# Altium PCB 3 Phase ESC.PcbDoc (part 1 of 2)
Units mm, origin at the board's own origin, x right, y up, seen from the top; angles counter-clockwise.
Board outline 102.1 x 51.3 mm, 2 copper layers (Top Layer, Bottom Layer); 75 components, 54 nets, 218 pads, 48 vias.
Unrouted connection lines stored in the file: 133.
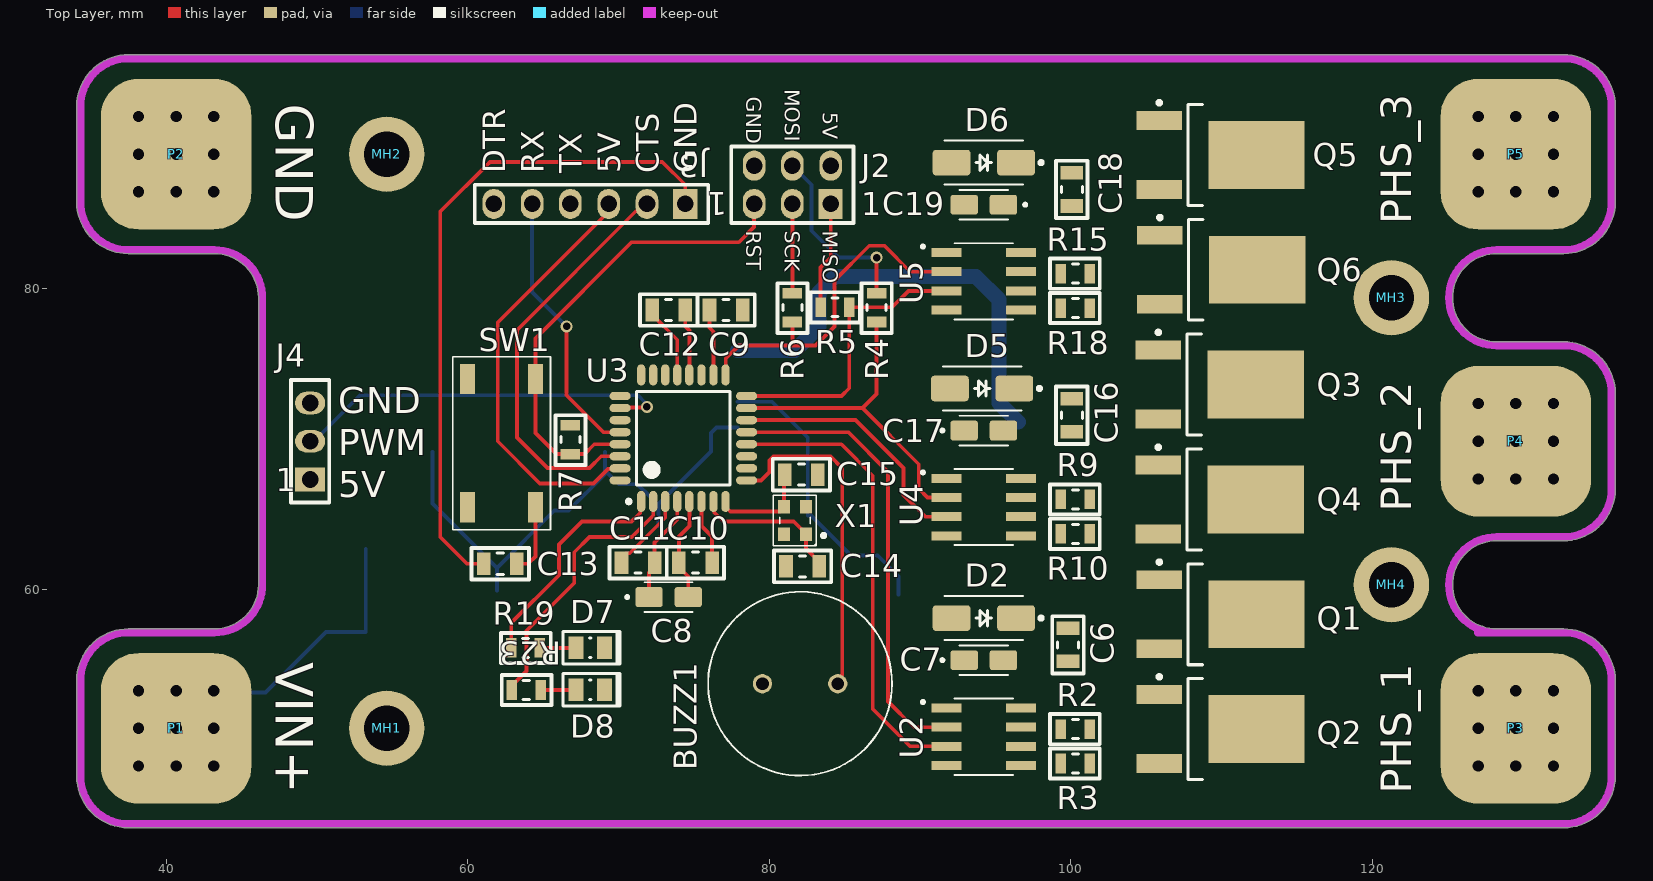
[diagram p0: Top Layer view]
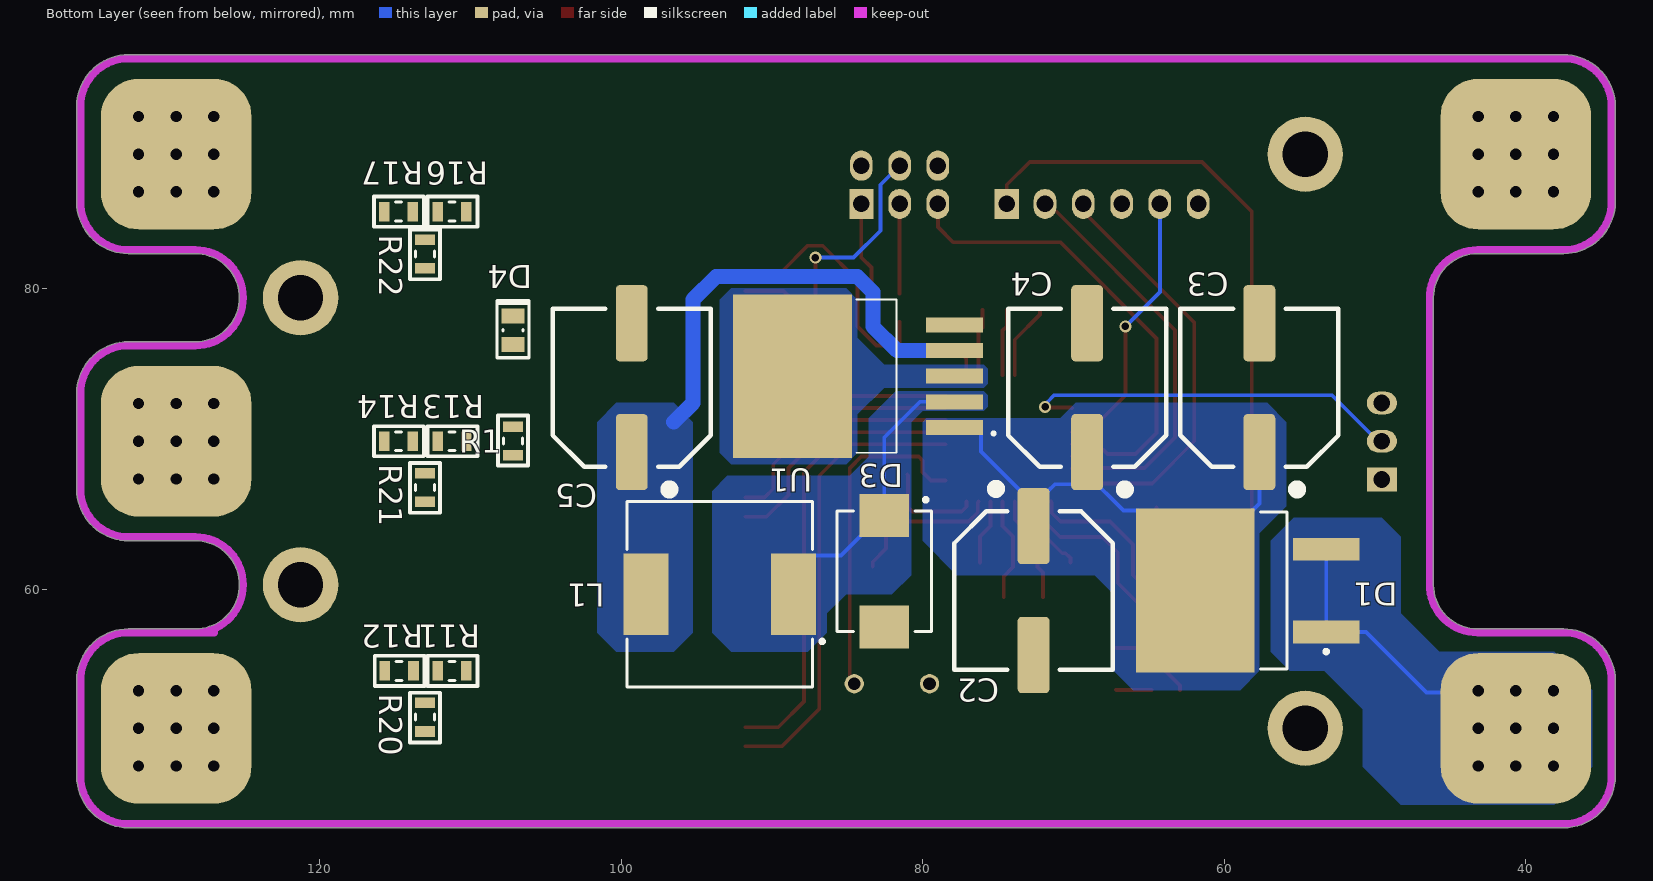
[diagram p1: Bottom Layer view, seen from below]

## Layer stack, top to bottom
Top Solder: solder mask 0.0102, Solder Resist, Dk 3.5
Top Layer: signal copper 0.0356
Dielectric 1: dielectric 0.32, FR-4, Dk 4.8
Bottom Layer: signal copper 0.0356
Bottom Solder: solder mask 0.0102, Solder Resist, Dk 3.5

## Board outline
37.463,44.2 cw(c37.465,47.625) 34.04,47.625 34.04,53.975 cw(c37.465,53.975) 37.465,57.4 43.18,57.4 ccw(c43.18,60.325) 46.105,60.324 46.105,60.325 46.105,79.375 ccw(c43.18,79.375) 43.181,82.3 43.18,82.3 37.465,82.3 cw(c37.465,85.725) 34.04,85.725 34.04,92.075 cw(c37.465,92.075) 37.465,95.5 37.467,95.5 132.715,95.5 cw(c132.715,92.075) 136.14,92.075 136.14,85.725 cw(c132.715,85.725) 132.715,82.3 128.27,82.3 ccw(c128.27,79.375) 125.345,79.375 ccw(c128.27,79.375) 128.27,76.45 132.715,76.45 cw(c132.715,73.025) 136.14,73.025 136.14,66.675 cw(c132.715,66.675) 132.715,63.25 128.27,63.25 ccw(c128.27,60.325) 125.345,60.325 ccw(c128.27,60.325) 128.27,57.4 132.715,57.4 cw(c132.715,53.975) 136.14,53.975 136.14,47.625 cw(c132.715,47.625) 132.715,44.2

## Design rules (kind name [scope] priority, off if disabled: settings)
Clearance [All] p1: gap=0.254 ignorepadtopadclearanceinfootprint=FALSE except(0: Arc-Hole Track-Hole SMDPad-Hole THPad-Hole Via-Hole Fill-Hole Poly-Hole Region-Hole Text-Hole)
PlaneConnect [All] p1: planeconnectstyle=Direct reliefexpansion=0.508 reliefentries=4 reliefconductorwidth=0.254 reliefairgap=0.254
PolygonConnect [All] p1: connectstyle=Direct reliefconductorwidth=0.254 reliefentries=4 polygonreliefangle="90 Angle" airgapwidth=0.254
RoutingVias [All] p1: holewidth=0.711 width=1.27 viastyle="Through Hole" minholewidth=0.711 minwidth=1.27 maxholewidth=0.711 maxwidth=1.27
SolderMaskExpansion [All] p1: expansion=0.102 istentingtop=FALSE
Width [All] p1: maxlimit=0.254 minlimit=0.254 preferedwidth=0.254
29 further rules are at their usual default settings.

## Components (designator, comment, footprint, x,y, rotation, side; value= is the part's Value field where it differs from the comment)
BUZZ1 "BUZZER" BUZZER 82.042,53.761 r180 top
C2 "BXJ63VC100MJ10TP" RADIAL-2_10.00MMX10.00MM 72.644,59.944 r270 bottom
C3 "BXJ63VC100MJ10TP" RADIAL-2_10.00MMX10.00MM 57.658,73.406 r90 bottom
C4 "BXJ63VC100MJ10TP" RADIAL-2_10.00MMX10.00MM 69.088,73.406 r90 bottom
C5 "BDS35VC330MJ10TP" RADIAL-2_10.00MMX10.00MM 99.314,73.406 r90 bottom
C6 "2.2uF" 0805_CAP 99.822,56.336 r270 top
C7 "CAP_10uF_10%_1206_10V_TANT" 1206_TANT_CAP 94.234,55.32 r0 top
C8 "CAP_10uF_10%_1206_10V_TANT" 1206_TANT_CAP 73.322,59.511 r0 top
C9 "1uF" 0805_CAP 77.132,78.561 r180 top
C10 "CAP_0.1uF_%20_50V_0805_X7R_CER" 0805_CAP 75.1,61.797 r0 top
C11 "CAP_0.1uF_%20_50V_0805_X7R_CER" 0805_CAP 71.29,61.797 r0 top
C12 "CAP_0.1uF_%20_50V_0805_X7R_CER" 0805_CAP 73.322,78.561 r0 top
C13 "CAP_0.1uF_%20_50V_0805_X7R_CER" 0805_CAP 62.146,61.722 r180 top
C14 "CAP_10nF_%5_50V_0805_C0G_CER" 0805_CAP 82.21,61.543 r0 top
C15 "CAP_10nF_%5_50V_0805_C0G_CER" 0805_CAP 82.126,67.639 r180 top
C16 "2.2uF" 0805_CAP 100.076,71.576 r270 top
C17 "CAP_10uF_10%_1206_10V_TANT" 1206_TANT_CAP 94.234,70.56 r0 top
C18 "2.2uF" 0805_CAP 100.076,86.562 r270 top
C19 "CAP_10uF_10%_1206_10V_TANT" 1206_TANT_CAP 94.234,85.546 r180 top
D1 "Diode 45V/40A" DPAK275P1410X480-3N 58.674,59.944 r0 bottom
D2 "DIODE_GENERAL_100V_1A_SMA" DIOM5226X220N-SMA 94.234,58.114 r180 top
D3 "DIODE_SCHOTTKY_40V_5A_SMC" DIOM6959X25M_B560C-13-F 82.55,61.214 r270 bottom
D4 "Red" DIOC2114X07N-0805-LED-RED 107.188,77.216 r270 bottom
D5 "DIODE_GENERAL_100V_1A_SMA" DIOM5226X220N-SMA 94.126,73.354 r180 top
D6 "DIODE_GENERAL_100V_1A_SMA" DIOM5226X220N-SMA 94.234,88.34 r180 top
D7 "Green" DIOC2114X07N-0805-LED-GREEN 68.122,56.149 r180 top
D8 "Blue" DIOC2114X07N-0805-LED-BLUE 68.122,53.355 r180 top
J2 "2x3 Male HDR" DIP_2X3_MALE_HEADER_2.54_PITCH 84.074,85.598 r180 top
J3 "1x6 Male HDR" DIP_1X6_MALE_HEADER_2.54_PITCH 74.422,85.598 r180 top
J4 "CONN_1X3_2.54mm_Male Header" DIP_1X3_MALE_HEADER_2.54_PITCH 49.53,67.31 r90 top
L1 "IND_47uH_4.3A_100mOHM_12X12MM_SMD" INDP120120X800N 93.472,59.69 r0 bottom
MH1 "Mounting Hole" MOUNTING_HOLE 54.61,50.8 r0 top
MH2 "Mounting Hole" MOUNTING_HOLE 54.61,88.9 r0 top
MH3 "Mounting Hole" MOUNTING_HOLE 121.285,79.375 r0 top
MH4 "Mounting Hole" MOUNTING_HOLE 121.285,60.325 r0 top
P1 "Power Pad" POWER_SOLDER_PAD 40.64,50.8 r0 top
P2 "Power Pad" POWER_SOLDER_PAD 40.64,88.9 r0 top
P3 "Power Pad" POWER_SOLDER_PAD 129.54,50.8 r0 top
P4 "Power Pad" POWER_SOLDER_PAD 129.54,69.85 r0 top
P5 "Power Pad" POWER_SOLDER_PAD 129.54,88.9 r0 top
Q1 "IRLR7843" DPAK229P991X239-3N 109.982,58.368 r0 top
Q2 "IRLR7843" DPAK229P991X239-3N 109.982,50.748 r0 top
Q3 "IRLR7843" DPAK229P991X239-3N 109.918,73.608 r0 top
Q4 "IRLR7843" DPAK229P991X239-3N 109.918,65.988 r0 top
Q5 "IRLR7843" DPAK229P991X239-3N 109.982,88.848 r0 top
Q6 "IRLR7843" DPAK229P991X239-3N 110.018,81.232 r0 top
R1 "RES_330 OHM_5%_0805_1/8W" 0805_RES 107.188,69.85 r270 bottom
R2 "RES_100 OHM_1%_0805_1/8W" 0805_RES 100.33,50.748 r0 top
R3 "RES_100 OHM_1%_0805_1/8W" 0805_RES 100.33,48.462 r0 top
R4 "RES_22 OHM_1%_1/8W_0805" 0805_RES 87.121,78.74 r90 top
R5 "RES_22 OHM_1%_1/8W_0805" 0805_RES 84.328,78.74 r180 top
R6 "RES_22 OHM_1%_1/8W_0805" 0805_RES 81.534,78.74 r90 top
R7 "10k Ohms" 0805_RES 66.802,69.977 r90 top
R9 "RES_100 OHM_1%_0805_1/8W" 0805_RES 100.33,65.988 r0 top
R10 "RES_100 OHM_1%_0805_1/8W" 0805_RES 100.33,63.702 r0 top
R11 "RES_33K OHM_1%_0805_1/8W" 0805_RES 111.252,54.61 r0 bottom
R12 "RES_33K OHM_1%_0805_1/8W" 0805_RES 114.767,54.61 r0 bottom
R13 "RES_33K OHM_1%_0805_1/8W" 0805_RES 111.252,69.85 r0 bottom
R14 "RES_33K OHM_1%_0805_1/8W" 0805_RES 114.808,69.85 r0 bottom
R15 "RES_100 OHM_1%_0805_1/8W" 0805_RES 100.33,80.974 r0 top
R16 "RES_33K OHM_1%_0805_1/8W" 0805_RES 111.252,85.09 r0 bottom
R17 "RES_33K OHM_1%_0805_1/8W" 0805_RES 114.808,85.09 r0 bottom
R18 "RES_100 OHM_1%_0805_1/8W" 0805_RES 100.33,78.688 r0 top
R19 "RES_330 OHM_5%_0805_1/8W" 0805_RES 63.795,56.134 r180 top
R20 "10k Ohms" 0805_RES 113.03,51.562 r90 bottom
R21 "10k Ohms" 0805_RES 113.03,66.802 r90 bottom
R22 "10k Ohms" 0805_RES 113.03,82.296 r90 bottom
R23 "RES_330 OHM_5%_0805_1/8W" 0805_RES 63.845,53.34 r180 top
SW1 "SWITCH_TACTILE_SPST-NO_0.05A_12V" TACT_SWITCH_6MMX6MM 62.23,69.723 r90 top
U1 "PMIC_LM2596S-5.0/NOPB" TO170P1524X483-6N 84.296,74.168 r0 bottom locked
U2 "DRIVER_IR2101" SOIC127P599X175-8N 94.234,50.24 r0 top
U3 "ATMEGA328P_AU" ATmega8U2_QFP127P600-8N 74.295,70.052 r90 top locked
U4 "DRIVER_IR2101" SOIC127P599X175-8N 94.234,65.48 r0 top
U5 "DRIVER_IR2101" SOIC127P599X175-8N 94.234,80.466 r0 top
X1 "20MHz" 4-SMD_CMOS_OSC_2.50MMX2.00 81.702,64.591 r90 top

## Footprints (in the part's own frame and the unit in brackets; to place one, negate y for a bottom-side part, rotate by r counter-clockwise, add the part's x,y. Pads: shape width x height; smd on the part's side, far side on the other; paste and mask are expansions set on the pad)
4-SMD_CMOS_OSC_2.50MMX2.00 [mm]
  rect 0.9x0.8 smd: 1(-0.925,-0.725) 2(0.925,-0.725) 3(0.925,0.725) 4(-0.925,0.725)
  silkscreen extent -1.68,-2.01 1.68,1.43, body extent -1.25,-1 1.25,1, height 0.91
0805_CAP [mm] "Chip Resistor, 2-Leads, Body 2,00x1,25mm, IPC Medium Density"
  rect 0.9x1.5 smd: 1(-1.1,0) 2(1.1,0)
  silkscreen extent -1.9,-1.05 1.9,1.05, body extent -1,-0.6 1,0.6, height 1.21
0805_RES [mm] "Chip Resistor, 2-Leads, Body 2,00x1,25mm, IPC Medium Density"
  rect 0.7x1.3 smd: 1(-0.975,0) 2(0.925,0)
  silkscreen extent -1.7,-1 1.6,1, body extent -1,-0.6 1,0.6, height 0.61
1206_TANT_CAP [mm]
  rrect25% 1.81x1.32 smd: 1(-1.3,0) 2(1.3,0)
  silkscreen extent -2.85,-0.98 1.6,0.98, body extent -1.6,-0.8 1.6,0.8, height 1.81
ATmega8U2_QFP127P600-8N [mm]
  oval 1.4x0.55 smd: 1(-4.2,2.8) 2(-4.2,2) 3(-4.2,1.2) 4(-4.2,0.4) 5(-4.2,-0.4) 6(-4.2,-1.2) 7(-4.2,-2) 8(-4.2,-2.8) 17(4.2,-2.8) 18(4.2,-2) 19(4.2,-1.2) 20(4.2,-0.4) 21(4.2,0.4) 22(4.2,1.2) 23(4.2,2) 24(4.2,2.8)
  oval 0.55x1.4 smd: 9(-2.8,-4.2) 10(-2,-4.2) 11(-1.2,-4.2) 12(-0.4,-4.2) 13(0.4,-4.2) 14(1.2,-4.2) 15(2,-4.2) 16(2.8,-4.2) 25(2.8,4.2) 26(2,4.2) 27(1.2,4.2) 28(0.4,4.2) 29(-0.4,4.2) 30(-1.2,4.2) 31(-2,4.2) 32(-2.8,4.2)
  silkscreen extent -4.32,-3.1 3.1,3.75, body extent -4.5,-4.5 4.5,4.5, height 1.45
BUZZER [mm]
  round 1.28 hole 0.85: 1(-2.5,0) 2(2.5,0)
  silkscreen extent -6.1,-6.1 6.1,6.1, body extent -6.1,-6.1 6.1,6.1, height 6.51
DIOC2114X07N-0805-LED-BLUE [mm] "Chip Diode, 2-Leads, Body 2,10x1,35mm, IPC Medium Density"
  rect 1x1.5 smd: 1(-0.95,0) 2(0.95,0)
  silkscreen extent -1.97,-1.07 1.83,1.07, body extent -1,-0.63 1,0.63, height 1.12
DIOC2114X07N-0805-LED-GREEN [mm] "Chip Diode, 2-Leads, Body 2,10x1,35mm, IPC Medium Density"
  rect 1x1.5 smd: 1(-0.95,0) 2(0.95,0)
  silkscreen extent -1.97,-1.07 1.83,1.07, body extent -1,-0.63 1,0.63, height 1.12
DIOC2114X07N-0805-LED-RED [mm] "Chip Diode, 2-Leads, Body 2,10x1,35mm, IPC Medium Density"
  rect 1x1.5 smd: 1(-0.95,0) 2(0.95,0)
  silkscreen extent -1.97,-1.07 1.83,1.07, body extent -1,-0.63 1,0.63, height 1.12
DIOM5226X220N-SMA [mm]
  rrect25% 2.5x1.7 smd: 1(-2.14,0) 2(2.14,0)
  silkscreen extent -3.92,-1.46 2.61,1.46, body extent -2.6,-1.36 2.6,1.36, height 2.7
DIOM6959X25M_B560C-13-F [mm] "Molded Diode, 2-Leads, Body 6,86x5,91mm, IPC Low Density"
  rect 2.85x3.3 smd: 1(-3.7,0) 2(3.7,0)
  silkscreen extent -4.87,-3.15 4,3.15, body extent -3.97,-3 3.97,2.91, height 2.25
DIP_1X3_MALE_HEADER_2.54_PITCH [mm]
  rect 1.6x2 hole 1.1: 1(0,0)
  oval 1.5x2 hole 1.1: 2(2.54,0) 3(5.08,0)
  silkscreen extent -1.52,-1.27 6.6,1.27, body extent -1.27,-1.14 6.35,1.4, height 8.96
DIP_1X6_MALE_HEADER_2.54_PITCH [mm]
  rect 1.6x2 hole 1.1: 1(0,0)
  oval 1.5x2 hole 1.1: 2(2.54,0) 3(5.08,0) 4(7.62,0) 5(10.16,0) 6(12.7,0)
  silkscreen extent -1.52,-1.27 13.97,1.27, body extent -1.27,-1.27 13.97,1.27, height 9.2
DIP_2X3_MALE_HEADER_2.54_PITCH [mm]
  rect 1.6x2 hole 1.1: 1(0,0)
  oval 1.5x2 hole 1.1: 2(2.54,0) 3(5.08,0) 4(0,-2.54) 5(2.54,-2.54) 6(5.08,-2.54)
  silkscreen extent -1.52,-3.81 6.6,1.27, body extent -1.27,-3.68 6.35,1.4, height 8.96
DPAK229P991X239-3N [mm] "D-PAK, 3-Pads, Body 6,21x6,73mm (max), IPC Medium Density"
  rect 3x1.25 smd: 1(-4.1,2.29) 3(-4.1,-2.29)
  rect 6.4x4.5 smd: 4(2.35,0)
  silkscreen extent -4.22,-3.35 -1.25,3.59, body extent -4.95,-3.27 4.95,3.27, height 2.51
DPAK275P1410X480-3N [mm] "D2-PAK, 3-Pads, Body 7,65x8,56mm (max), IPC Medium Density"
  rect 4.4x1.5 smd: 1(-5.45,2.75) 3(-5.45,-2.75)
  rect 7.86x10.86 smd: 4(3.25,0)
  silkscreen extent -5.57,-5.2 -1.08,5.2, body extent -5.72,-5.35 6.13,5.35, height 1.77
INDP120120X800N [mm]
  rect 3x5.4 smd: 1(-4.9,0) 2(4.9,0)
  silkscreen extent -6.92,-6.15 6.15,6.15, body extent -6.05,-6.05 6.05,6.05, height 7.29
MOUNTING_HOLE [mm]
  round 5 hole 3: 1(0,0)
POWER_SOLDER_PAD [mm]
  rrect50% 10x10 smd: 1(0,0)
  rrect50% 10x10 smd far side: 1(0,0)
RADIAL-2_10.00MMX10.00MM [mm]
  rrect25% 5.06x2.11 smd: 1(-4.275,0) 2(4.275,0)
  silkscreen extent -6.85,-5.25 5.25,5.25, body extent -5.45,-5.25 5.45,5.25, height 10.56
SOIC127P599X175-8N [mm]
  rect 1.97x0.6 smd: 1(-2.47,1.905) 2(-2.47,0.635) 3(-2.47,-0.635) 4(-2.47,-1.905) 5(2.47,-1.905) 6(2.47,-0.635) 7(2.47,0.635) 8(2.47,1.905)
  silkscreen extent -4.14,-2.52 1.95,2.52, body extent -3,-2.45 3,2.45, height 1.75
TACT_SWITCH_6MMX6MM [mm]
  rect 2x1 smd: 1(-4.25,2.25) 2(4.25,2.25) 3(-4.25,-2.25) 4(4.25,-2.25)
  silkscreen extent -5.75,-3.25 5.75,3.25, body extent -4.5,-3 4.5,3, height 4.31
TO170P1524X483-6N [mm]
  rect 3.79x0.99 smd: 1(-6.4,3.4) 2(-6.4,1.7) 3(-6.4,0) 4(-6.4,-1.7) 5(-6.4,-3.4)
  rect 7.88x10.84 smd paste-6: 6(4.35,0)
  silkscreen extent -9.1,-5.08 0.09,5.08, body extent -7.18,-5.08 7.18,5.08, height 4.65

## Part data
C2 C3 C4: library part CAP_100uF_20%_63V_SMD_ALUM, "CAP.EL.100uF 63V 10x10 105C 5000Hrs SMD", Capacitance=100uF, Manufacturer=SAMYOUNG, Ripple Current=350mA, Tolerance=%20, Voltage Rating=63V, Dimensions=10mmx10mm
C5: library part CAP_330uF_20%_35V_SMD_ALUM, "CAP.EL.330uF 35V 10x10 105C 2000Hrs SMD", Capacitance=330uF, Manufacturer=SAMYOUNG, Ripple Current=450mA, Tolerance=%20, Voltage Rating=35V, Dimensions=10mmx10mm
C6 C16 C18: library part CAP_2.2uF_%10_25V_0805_X5R_CER, "CAP CER 2.2UF 25V X5R 0805", Case Code (Metric)=2012, Case Code (Imperial)=0805, Dielectric=X5R, Manufacturer=Samsung, Manufacturer Part Number=CL21A225KAFNNNE, Max Operating Temperature=85°C, Min Operating Temperature=-55°C, Package Quantity=1, Supplier Part Number 1=1276-1763-1-ND, Tolerance=10%, Voltage Rating=25V, Capacitance=2.2uF, Case/Package=0805, Category="Ceramic Capacitors", ComponentLink1Description=https://datasheet.ciiva.com/25798/cl21a225kafnnne-25798496.pdf?src-supplier=Digi-Key, ComponentLink1URL=https://datasheet.ciiva.com/25798/cl21a225kafnnne-25798496.pdf?src-supplier=Digi-Key, ComponentLink2Description=https://datasheet.ciiva.com/16425/samsung20passive20cl21a225kafnnne-16425804.pdf?src-supplier=Future+Electronics, ComponentLink2URL=https://datasheet.ciiva.com/16425/samsung20passive20cl21a225kafnnne-16425804.pdf?src-supplier=Future+Electronics, ComponentLink3Description=https://datasheet.ciiva.com/26838/getdatasheetpartid-745307-26838602.pdf?src-supplier=Verical, ComponentLink3URL=https://datasheet.ciiva.com/26838/getdatasheetpartid-745307-26838602.pdf?src-supplier=Verical, Construction=Flat, Depth=1.25mm, Height=1.25mm, Length=2mm, Mount="Surface Mount", Packaging="Tape and Reel", Pricing 1="1=0,13000, 10=0,09300, 50=0,05280, 100=0,04380, 500=0,03070, 1000=0,02541 (USD)", Radiation Hardening=No, RoHS=Yes, RoHS Compliant=Yes, Series=CL, Stock 1=282255, Supplier 1=Digi-Key, Thickness=0.053inch, Width=0.049inch
C7 C8 C17 C19: "Cap Tant Solid 10uF 10V A CASE 10% (3.2 X 1.6 X 1.6mm) Inward L SMD 3216-18 3 Ohm 125C T/R", Capacitance=10uF, Case Code (Metric)=3216, Case Code (Imperial)=1206, Case/Package=Molded, ESR (Equivalent Series Resistance)=3R, Leakage Current=1uA, Manufacturer="Kyocera AVX", Manufacturer Part Number=TAJA106K010SNJ, Max Operating Temperature=125°C, Min Operating Temperature=-55°C, Package Quantity=8000, Supplier Part Number 1=478-13122-1-ND, Tolerance=10%, Voltage Rating=10V, Category="Tantalum Capacitors", ComponentLink1Description=https://datasheet.ciiva.com/12909/taj-27497-12909898.pdf?src-supplier=Mouser, ComponentLink1URL=https://datasheet.ciiva.com/12909/taj-27497-12909898.pdf?src-supplier=Mouser, Construction=Flat, Depth=1.6mm, Dissipation Factor=6%, Height=1.8mm, Lead Free="Lead Free", Length=3.2mm, Number of Pins=2, Packaging="Tape and Reel", Polarity=Polar, Pricing 1="1=0,31000, 10=0,21300, 50=0,14920, 100=0,12780, 500=0,09584, 1000=0,08094, 2500=0,07668 (USD)", Radiation Hardening=No, RoHS=Yes, RoHS Compliant=Yes, Series=TAJ, Stock 1=14579, Supplier 1=Digi-Key, Termination=SMD/SMT, Voltage Rating (DC)=10V, Width=1.6mm
C9: library part CAP_1uF_%10_25V_0805_X7R_CER, "陶瓷电容 1uF(105) 1uF ±10% 25V 0805", Case Code (Metric)=2012, Case Code (Imperial)=0805, Dielectric=X7R, Manufacturer=Samsung, Manufacturer Part Number=CL21B105KAFNNNG, Max Operating Temperature=125°C, Min Operating Temperature=-55°C, Package Quantity=3000, Supplier Part Number 1=1276-6469-1-ND, Tolerance=10%, Voltage=25V, Capacitance=1uF, Case/Package=0805, Category="Ceramic Capacitors", ComponentLink1Description=https://datasheet.ciiva.com/26920/getdatasheetpartid-698495-26920200.pdf?src-supplier=Verical, ComponentLink1URL=https://datasheet.ciiva.com/26920/getdatasheetpartid-698495-26920200.pdf?src-supplier=Verical, ComponentLink2Description=https://datasheet.ciiva.com/29199/455911-da-01-en-vs-kondensator-0805-29199043.pdf?src-supplier=Conrad, ComponentLink2URL=https://datasheet.ciiva.com/29199/455911-da-01-en-vs-kondensator-0805-29199043.pdf?src-supplier=Conrad, ComponentLink3Description=https://datasheet.ciiva.com/16428/cl05b104kq5nnnc-16428871.pdf?src-supplier=Future+Electronics, ComponentLink3URL=https://datasheet.ciiva.com/16428/cl05b104kq5nnnc-16428871.pdf?src-supplier=Future+Electronics, Depth=1.25mm, Height=1.25mm, Length=2mm, Material=Ceramic, Mount="Surface Mount", Packaging="Tape and Reel", Pricing 1="1=0,10000, 10=0,07100, 50=0,03880, 100=0,03170, 500=0,02264, 1000=0,01779 (USD)", Radiation Hardening=No, RoHS=Yes, RoHS Compliant=Yes, Series=CL, Stock 1=509034, Supplier 1=Digi-Key, Thickness=0.053inch, Voltage Rating=25V, Width=0.049inch
C10 C11 C12 C13: "Cap Ceramic 0.1uF 50V X7R 20% SMD 0805 125C Paper T/R", Capacitance=100nF, Case/Package=0805, Dielectric=X7R, Dielectric Material=Ceramic, Manufacturer=KEMET, Manufacturer Part Number=C0805C104M5RACTU, Max Operating Temperature=125°C, Min Operating Temperature=-55°C, Supplier Part Number 1=399-C0805C104M5RAC7800CT-ND, Tolerance=20%, Voltage Rating (DC)=50V, Category="Ceramic Capacitors", ComponentLink1Description=http://uk.rs-online.com/webdocs/13da/0900766b813daa06.pdf?src-supplier=RSComponents, ComponentLink1URL=http://uk.rs-online.com/webdocs/13da/0900766b813daa06.pdf?src-supplier=RSComponents, ComponentLink2Description=https://www.verical.com/server-webapp/html/getDatasheet?partID=774625&src-supplier=Verical, ComponentLink2URL=https://www.verical.com/server-webapp/html/getDatasheet?partID=774625&src-supplier=Verical, ComponentLink3Description=http://www.farnell.com/datasheets/2739857.pdf?src-supplier=Farnell, ComponentLink3URL=http://www.farnell.com/datasheets/2739857.pdf?src-supplier=Farnell, ComponentLink4Description=http://uk.rs-online.com/webdocs/1515/0900766b81515223.pdf?src-supplier=RSComponents, ComponentLink4URL=http://uk.rs-online.com/webdocs/1515/0900766b81515223.pdf?src-supplier=RSComponents, ComponentLink5Description=http://components.arrow.com/part/dataview/0323_00324812?src-supplier=Arrow+Europe, ComponentLink5URL=http://components.arrow.com/part/dataview/0323_00324812?src-supplier=Arrow+Europe, ComponentLink6Description=http://uk.rs-online.com/webdocs/1528/0900766b81528e2f.pdf?src-supplier=RSComponents, ComponentLink6URL=http://uk.rs-online.com/webdocs/1528/0900766b81528e2f.pdf?src-supplier=RSComponents, ComponentLink7Description=http://www.farnell.com/datasheets/2739857.pdf?src-supplier=Newark, ComponentLink7URL=http://www.farnell.com/datasheets/2739857.pdf?src-supplier=Newark, ComponentLink8Description=http://www.alliedelec.com/m/d/9bfe7773041ffe9d406e68bc7b377fdd.pdf?src-supplier=Allied+Electronics, ComponentLink8URL=http://www.alliedelec.com/m/d/9bfe7773041ffe9d406e68bc7b377fdd.pdf?src-supplier=Allied+Electronics, ComponentLink9Description=https://api.kemet.com/component-edge/download/datasheet/C0805C104M5RACTU.pdf?src-supplier=Digi-Key, ComponentLink9URL=https://api.kemet.com/component-edge/download/datasheet/C0805C104M5RACTU.pdf?src-supplier=Digi-Key, ComponentLink10Description=http://capacitoredge.kemet.com/capedge2/DataSheet?pn=C0805C104M5RACTU&src-supplier=Avnet+Europe, ComponentLink10URL=http://capacitoredge.kemet.com/capedge2/DataSheet?pn=C0805C104M5RACTU&src-supplier=Avnet+Europe, ComponentLink11Description=http://www.farnell.com/datasheets/2739857.pdf?src-supplier=Element14, ComponentLink11URL=http://www.farnell.com/datasheets/2739857.pdf?src-supplier=Element14, ComponentLink12Description=http://www.mouser.com/ds/2/212/KEM_C1002_X7R_SMD-1102033.pdf?src-supplier=Mouser, ComponentLink12URL=http://www.mouser.com/ds/2/212/KEM_C1002_X7R_SMD-1102033.pdf?src-supplier=Mouser, ComponentLink13Description=https://www.verical.com/server-webapp/html/getDatasheet?partID=91523&src-supplier=Verical, ComponentLink13URL=https://www.verical.com/server-webapp/html/getDatasheet?partID=91523&src-supplier=Verical, ComponentLink14Description=http://components.arrow.com/part/dataview/2091108S8109171N7429?src-supplier=Arrow+Electronics, ComponentLink14URL=http://components.arrow.com/part/dataview/2091108S8109171N7429?src-supplier=Arrow+Electronics, Depth=1.25mm, Height=0.9mm, Length=2mm, Mount="Surface Mount", Packaging="Tape and Reel", Pricing 1="1=0,10000, 10=0,06400, 50=0,03500, 100=0,02860, 500=0,02040, 1000=0,01603 (USD)", Radiation Hardening=No, RoHS=Yes, Stock 1=4863, Supplier 1=Digi-Key
C14 C15: "CGA Series 0805 10 nF 50 V ±5 % Tolerance C0G SMT Multilayer Ceramic Capacitor", Capacitance=10nF, Case Code (Metric)=2012, Case Code (Imperial)=0805, Dielectric=C0G, Manufacturer=TDK, Manufacturer Part Number=CGA4C2C0G1H103J060AA, Max Operating Temperature=125°C, Min Operating Temperature=-55°C, Package Quantity=1, Ratings=AEC-Q200, Resistor Type=Ceramic, Supplier Part Number 1=445-6947-1-ND, Tolerance=5%, Voltage Rating=50V, Case/Package=0805, Category="Ceramic Capacitors", ComponentLink1Description=https://datasheet.ciiva.com/15215/getdatasheetpartid-712412-15215921.pdf?src-supplier=Verical, ComponentLink1URL=https://datasheet.ciiva.com/15215/getdatasheetpartid-712412-15215921.pdf?src-supplier=Verical, ComponentLink2Description=https://datasheet.ciiva.com/24219/cga4c2c0g1h103j060aa-265903-24219348.pdf?src-supplier=Mouser, ComponentLink2URL=https://datasheet.ciiva.com/24219/cga4c2c0g1h103j060aa-265903-24219348.pdf?src-supplier=Mouser, Depth=1.25mm, Height=0.6mm, Lead Free="Lead Free", Length=2mm, Mount="Surface Mount", Packaging="Tape and Reel", Pricing 1="1=0,32000, 10=0,21800, 50=0,14520, 100=0,12340, 500=0,08712, 1000=0,07623 (USD)", Radiation Hardening=No, REACH SVHC="No SVHC", RoHS=Yes, RoHS Compliant=Yes, Series=CGA, Stock 1=35061, Supplier 1=Digi-Key, Termination=SMD/SMT, Thickness=0.028inch, Voltage Rating (DC)=50V, Weight=0.000194oz, Width=0.049inch
D1: library part DIODE_SCHOTTKY_45V_40A_TO263, "Diode Schottky 45V 40A 3-Pin TO-263 T/R", Manufacturer=Panjit, Manufacturer Part Number=SBM4045LDC_R2_00001, Supplier Part Number 1=241-SBM4045LDCR20000, Pricing 1="1=1,48000, 10=1,34000, 50=1,34000, 100=1,04000, 1000=0,67700, 10000=0,63100 (USD)", Supplier 1=Mouser
D2 D5 D6: "Si-diode 1A 100V Sma", Case/Package=SMA, Forward Current=1A, Manufacturer="Pan Jit", Manufacturer Part Number=US1B_R1_00001, Max Operating Temperature=150°C, Max Repetitive Reverse Voltage (Vrrm)=100V, Max Reverse Current=1uA, Min Operating Temperature=-55°C, Peak Non-Repetitive Surge Current=30A, Supplier Part Number 1=3757-US1B_R1_00001CT-ND, Category="Rectifier Diodes", Element Configuration=Single, Mount="Surface Mount", Pricing 1="1=0,42000, 10=0,34100, 100=0,18060, 500=0,11880 (USD)", Reverse Recovery Time=50ns, RoHS=Yes, RoHS Compliant=Yes, Stock 1=5400, Supplier 1=Digi-Key
D3: "VR=40V IF=5A 300pF", Average Rectified Current=5A, Capacitance=300pF, Case/Package=SMC, Forward Voltage=550mV, Manufacturer=Diodes, Manufacturer Part Number=B540C-13-F, Max Forward Surge Current (Ifsm)=100A, Max Operating Temperature=125°C, Max Repetitive Reverse Voltage (Vrrm)=40V, Max Reverse Current=500uA, Min Operating Temperature=-55°C, Package Quantity=3000, Supplier Part Number 1=B540C-FDICT-ND, Category="Rectifier Diodes", Contact Plating=Tin,Matte, Current=5A, Current Rating=5A, Element Configuration=Single, Forward Current=5A, Height=2.5mm, Lead Free="Lead Free", Length=7.11mm, Max Reverse Voltage (DC)=40V, Mount="Surface Mount", Number of Pins=2, Output Current=5A, Packaging="Cut Tape", Peak Non-Repetitive Surge Current=100A, Polarity=Standard, Radiation Hardening=No, REACH SVHC="No SVHC", RoHS=Yes, RoHS Compliant=Yes, Series="B520C/CQ - B560C/CQ", Supplier 1=Digi-Key, Termination=SMD/SMT, Voltage=40V, Voltage Rating (DC)=40V, Weight=0.007408oz, Width=6.22mm
D4: library part "LED_RED CLEAR_2SMD/0805", "Led Red Clear 2SMD", Case/Package=0805, Forward Voltage=2V, Lens Color=Colorless, Manufacturer=Everlight, Manufacturer Part Number=EAST2012RA1, Supplier Part Number 1=1080-EAST2012RA1CT-ND, Test Current=20mA, Category=LEDs, Color=Red, ComponentLink1Description=http://www.mouser.com/ds/2/143/EAST2012RA1-707412.pdf?src-supplier=Mouser, ComponentLink1URL=http://www.mouser.com/ds/2/143/EAST2012RA1-707412.pdf?src-supplier=Mouser, ComponentLink2Description=https://everlightamericas.com/index.php?controller=attachment&id_attachment=1047&src-supplier=Digi-Key, ComponentLink2URL=https://everlightamericas.com/index.php?controller=attachment&id_attachment=1047&src-supplier=Digi-Key, Dominant Wavelength=626nm, Height=1mm, Length=2mm, Lens Transparency=Clear, Luminous Intensity=79mcd, Mount="Surface Mount", Packaging="Tape and Reel", Pricing 1="1=0,23000, 10=0,12300, 100=0,05840, 500=0,04996, 1000=0,03842 (USD)", RoHS Compliant=Yes, Stock 1=154, Supplier 1=Digi-Key, Viewing Angle=120°, Width=1.25mm
D7: library part "LED_GREEN CLEAR_2SMD/0805", "Led Green Clear 2SMD", Case/Package=0805, Forward Voltage=3.4V, Lens Color=Colorless, Manufacturer=Everlight, Manufacturer Part Number=EAST2012GA5, Supplier Part Number 1=1080-EAST2012GA5CT-ND, Test Current=20mA, Category=LEDs, Color=Green, ComponentLink1Description=http://www.mouser.com/ds/2/143/EAST2012GA5-707028.pdf?src-supplier=Mouser, ComponentLink1URL=http://www.mouser.com/ds/2/143/EAST2012GA5-707028.pdf?src-supplier=Mouser, ComponentLink2Description=https://everlightamericas.com/index.php?controller=attachment&id_attachment=1042&src-supplier=Digi-Key, ComponentLink2URL=https://everlightamericas.com/index.php?controller=attachment&id_attachment=1042&src-supplier=Digi-Key, Dominant Wavelength=523nm, Height=1mm, Length=2mm, Lens Transparency=Clear, Luminous Intensity=315mcd, Mount="Surface Mount", Packaging="Tape and Reel", Pricing 1="1=0,44000, 10=0,29000, 100=0,19380, 500=0,13406, 1000=0,11172 (USD)", RoHS Compliant=Yes, Stock 1=15531, Supplier 1=Digi-Key, Viewing Angle=140°, Width=1.25mm
D8: library part "LED_BLUE CLEAR_2SMD/0805", "Blue 0805 140° 112 mcd Clear 3.3 V Surface Mount LED", Case/Package=0805, Forward Voltage=3.3V, Lens Color=Colorless, Manufacturer=Everlight, Manufacturer Part Number=EAST2012BA2, Supplier Part Number 1=EAST2012BA2-ND, Test Current=20mA, Category=LEDs, Color=Blue, ComponentLink1Description=http://www.mouser.com/ds/2/143/EAST2012BA2-707392.pdf?src-supplier=Mouser, ComponentLink1URL=http://www.mouser.com/ds/2/143/EAST2012BA2-707392.pdf?src-supplier=Mouser, ComponentLink2Description=https://everlightamericas.com/index.php?controller=attachment&id_attachment=1036&src-supplier=Digi-Key, ComponentLink2URL=https://everlightamericas.com/index.php?controller=attachment&id_attachment=1036&src-supplier=Digi-Key, Dominant Wavelength=471nm, Height=1.1mm, Lead Free="Lead Free", Length=2mm, Lens Transparency=Clear, Luminous Intensity=79mcd, Mount="Surface Mount", Packaging="Tape and Reel", Pricing 1="9000=0,05724 (USD)", RoHS=Yes, RoHS Compliant=Yes, Supplier 1=Digi-Key, Viewing Angle=140°, Width=1.25mm
J2: library part "CONN_2X3_2.54mm_Male Header", "Conn Unshrouded Header HDR 6 POS 2.54mm Solder ST Thru-Hole Poly Bag", Manufacturer="Amphenol ICC / FCI", Manufacturer Part Number=67998-206, Category="Headers and Wire Housings", ComponentLink1Description=http://portal.fciconnect.com/Comergent//fci/drawing/67996.pdf?src-supplier=Digi-Key, ComponentLink1URL=http://portal.fciconnect.com/Comergent//fci/drawing/67996.pdf?src-supplier=Digi-Key, ComponentLink2Description=http://portal.fciconnect.com/Comergent/fci/drawing/67996.pdf?src-supplier=Avnet, ComponentLink2URL=http://portal.fciconnect.com/Comergent/fci/drawing/67996.pdf?src-supplier=Avnet, Pricing 1="4800=0,21933, 5600=0,21344, 10400=0,20314, 24000=0,19578, 48000=0,18989, 240000=0,18400, 480000=0,17958 (USD)", Supplier 1=Avnet, Supplier Part Number 1=67998-206
J3: library part "CONN_1X6_2.54m_Male Header", "PH Series 6 Position Through Hole Single Row Straight .100 Header", Manufacturer="Adam Equipment", Manufacturer Part Number=PH1-06-UA, Supplier Part Number 1=2057-PH1-06-UA-ND, Category=Connectors, ComponentLink1Description=http://www.adam-tech.com/catalog/2012/page_312-315.pdf?src-supplier=Future+Electronics, ComponentLink1URL=http://www.adam-tech.com/catalog/2012/page_312-315.pdf?src-supplier=Future+Electronics, Contact Plating=Gold, Lead Free="Lead Free", Mount="Through Hole", Number of Contacts=6, Number of Positions=6, Number of Rows=1, Packaging=Bag, Pitch=2.54mm, Pricing 1="1=0,13000, 10=0,10000, 100=0,07370, 500=0,06098, 1000=0,05336, 5000=0,04574, 10000=0,04447 (USD)", RoHS=Yes, Stock 1=1029, Supplier 1=Digi-Key
J4: "Conn Header Vert 3POS 2.54MM", Color=Black, Manufacturer=Sullins, Manufacturer Part Number=PREC003SAAN-RC, Package Quantity=1, Supplier Part Number 1=S1012EC-03-ND, Category=Connectors, ComponentLink1Description=https://datasheet.ciiva.com/740/zrzczzzszzn-rc-st-11635-b-740842.pdf?src-supplier=Digi-Key, ComponentLink1URL=https://datasheet.ciiva.com/740/zrzczzzszzn-rc-st-11635-b-740842.pdf?src-supplier=Digi-Key, Connector Type="Male Pin", Contact Mating Length=0.23inch, Contact Plating=Tin, Contact Type="Male Pin", Mount="Through Hole", Number of Positions=3, Number of Rows=1, Packaging=Bulk, Pitch=0.1inch, Pricing 1="1=0,09000, 10=0,08400, 25=0,06240, 50=0,05340, 100=0,05170, 250=0,04456, 500=0,04276 (USD)", RoHS=Yes, RoHS Compliant=Yes, Series=-, Stock 1=15048, Supplier 1=Digi-Key, Termination=Solder
L1: "INDUCTOR POWER 47UH 12X12MM SMD", Current Rating=4.3A, DC Resistance (DCR)=100mR, Manufacturer="CORE MASTER", Manufacturer Part Number=SRI1207-470M, Tolerance=20%, Inductance=47uH
MH1 MH2 MH3 MH4: library part MOUNTING_HOLE
P1 P2 P3 P4 P5: library part POWER_PAD
Q1 Q2 Q3 Q4 Q5 Q6: library part MOSFET_IRLR7843TRPBF, "MOSFET N-CH 30V 161A DPAK", Case/Package=TO-252-3, Continuous Drain Current (ID)=161A, Drain to Source Breakdown Voltage=30V, Drain to Source Resistance=3.3mR, Gate to Source Voltage (Vgs)=20V, Manufacturer=Infineon, Manufacturer Part Number=IRLR7843TRPBF, Max Operating Temperature=175°C, Max Power Dissipation=140W, Min Operating Temperature=-55°C, Supplier Part Number 1=IRLR7843PBFCT-ND, Threshold Voltage=2.3V, Input Capacitance=4.38nF, Category=MOSFETs, ComponentLink1Description=http://www.farnell.com/datasheets/107858.pdf?src-supplier=Farnell, ComponentLink1URL=http://www.farnell.com/datasheets/107858.pdf?src-supplier=Farnell, ComponentLink2Description=https://www.alliedelec.com/m/d/e4530362cf37d0e7350522b44819c1b2.pdf?src-supplier=Allied+Electronics, ComponentLink2URL=https://www.alliedelec.com/m/d/e4530362cf37d0e7350522b44819c1b2.pdf?src-supplier=Allied+Electronics, ComponentLink3Description=http://www.farnell.com/datasheets/107858.pdf?src-supplier=Element14, ComponentLink3URL=http://www.farnell.com/datasheets/107858.pdf?src-supplier=Element14, ComponentLink4Description=https://www.infineon.com/dgdl/irlr7843pbf.pdf?fileId=5546d462533600a40153566de53526d8&src-supplier=Digi-Key, ComponentLink4URL=https://www.infineon.com/dgdl/irlr7843pbf.pdf?fileId=5546d462533600a40153566de53526d8&src-supplier=Digi-Key, ComponentLink5Description=http://www.infineon.com/dgdl/irlr7843pbf.pdf?fileId=5546d462533600a40153566de53526d8&src-supplier=Digi-Key, ComponentLink5URL=http://www.infineon.com/dgdl/irlr7843pbf.pdf?fileId=5546d462533600a40153566de53526d8&src-supplier=Digi-Key, Contact Plating=Tin,Matte, Drain to Source Voltage (Vdss)=30V, Halogen Free="Halogen Free", Height=0.094inch, Lead Free="Contains Lead", Length=0.264inch, Max Dual Supply Voltage=30V, Mount="Surface Mount", Number of Pins=3, Packaging="Cut Tape", Power Dissipation=140W, Pricing 1="1=1,73000, 10=1,54800, 100=1,20670, 500=0,99682, 1000=0,87440 (USD)", Rds On Max=3.3mR, REACH SVHC="No SVHC", Rise Time=42ns, RoHS=Yes, RoHS Compliant=Yes, Stock 1=5978, Supplier 1=Digi-Key, Turn-Off Delay Time=34ns, Turn-On Delay Time=25ns, Width=0.245inch
R1 R19 R23: "Res Thick Film 0805 330 Ohm 5% 0.125W(1/8W) ±100ppm/C Pad SMD Automotive T/R", Manufacturer="TE Connectivity", Manufacturer Part Number=CRGCQ0805J330R, Resistance=330R, Supplier Part Number 1=A130131CT-ND, Category="Chip SMD Resistors", ComponentLink1Description=https://www.te.com/commerce/DocumentDelivery/DDEController?Action=srchrtrv&amp;DocNm=1773204-3&amp;DocType=DS&amp;DocLang=English&src-supplier=Digi-Key, ComponentLink1URL=https://www.te.com/commerce/DocumentDelivery/DDEController?Action=srchrtrv&amp;DocNm=1773204-3&amp;DocType=DS&amp;DocLang=English&src-supplier=Digi-Key, Pricing 1="1=0,10000, 10=0,04400, 100=0,01780, 1000=0,00798, 2500=0,00693 (USD)", RoHS=Yes, Stock 1=75221, Supplier 1=Digi-Key
R2 R3 R9 R10 R15 R18: "贴片电阻 100Ω ± 1.00% 0.125W ± 100ppm/℃ 0805", Case Code (Metric)=2012, Case Code (Imperial)=0805, Manufacturer=Yageo, Manufacturer Part Number=RC0805FR-07100RL, Max Operating Temperature=155°C, Max Power Dissipation=125mW, Min Operating Temperature=-55°C, Package Quantity=5000, Resistance=100R, Resistor Type="Thick Film", Supplier Part Number 1=311-100CRCT-ND, Temperature Coefficient=100ppm/°C, Tolerance=1%, Voltage Rating=150V, Application(s)="HIGH RELIABILITY", Case/Package=0805, Category="Chip SMD Resistors", ComponentLink1Description=https://datasheet.ciiva.com/11808/0900766b8106beab-11808877.pdf?src-supplier=RSComponents, ComponentLink1URL=https://datasheet.ciiva.com/11808/0900766b8106beab-11808877.pdf?src-supplier=RSComponents, ComponentLink2Description=https://datasheet.ciiva.com/7941/1697719-7941680.pdf?src-supplier=Element14, ComponentLink2URL=https://datasheet.ciiva.com/7941/1697719-7941680.pdf?src-supplier=Element14, ComponentLink3Description=https://datasheet.ciiva.com/7660/38627-7660797.pdf?src-supplier=Element14, ComponentLink3URL=https://datasheet.ciiva.com/7660/38627-7660797.pdf?src-supplier=Element14, ComponentLink4Description=https://datasheet.ciiva.com/2456/pyu-r-int-thick-7-2456987.pdf?src-supplier=Digi-Key, ComponentLink4URL=https://datasheet.ciiva.com/2456/pyu-r-int-thick-7-2456987.pdf?src-supplier=Digi-Key, Depth=1.25mm, Features="Moisture Resistant", Height=0.5mm, Lead Free="Lead Free", Lead Pitch=0.4mm, Length=2mm, Military Standard=Not, Number of Pins=2, Number of Terminations=2, Packaging="Cut Tape", Power Rating=125mW, Pricing 1="1=0,10000, 10=0,04200, 100=0,01690, 1000=0,00759, 2500=0,00659 (USD)", REACH SVHC=Unknown, RoHS=Yes, RoHS Compliant=Yes, Series=RC, Stock 1=3418646, Supplier 1=Digi-Key, Technology="THICK FILM", Termination=SMD/SMT, Type="General Purpose", Voltage Rating (DC)=150V, Weight=0.000917oz, Width=1.25mm
R4 R5 R6: "Res Thick Film 0805 22 Ohm 1% 0.125W(1/8W) ±100ppm/C Pad SMD T/R", Case Code (Metric)=2012, Case Code (Imperial)=0805, Manufacturer="Vishay Dale", Manufacturer Part Number=CRCW080522R0FKEAC, Max Operating Temperature=155°C, Max Power Dissipation=125mW, Min Operating Temperature=-55°C, Resistance=22R, Resistor Type="Thick Film", Supplier Part Number 1=541-4151-1-ND, Temperature Coefficient=100ppm/°C, Tolerance=1%, Case/Package=0805, ComponentLink1Description=http://www.vishay.com/docs/28773/crcwce3.pdf?src-supplier=Digi-Key, ComponentLink1URL=http://www.vishay.com/docs/28773/crcwce3.pdf?src-supplier=Digi-Key, Number of Terminations=2, Packaging="Tape and Reel", Pricing 1="1=0,10000, 10=0,06300, 100=0,02540, 1000=0,01143, 2500=0,00992 (USD)", RoHS=Yes, RoHS Compliant=Yes, Stock 1=199510, Supplier 1=Digi-Key
R7 R20 R21 R22: library part "RES_10K OHM_%1_0805_1/8W", "Res SMD 0805 10K 1% 0.125W T.C.100PPM", Capacitance=100nF, Case Code (Metric)=2012, Case Code (Imperial)=0805, Dielectric=X7R, Dielectric Material=Ceramic, Manufacturer=TDK, Manufacturer Part Number=C2012X7R1H104K085AA, Max Operating Temperature=125°C, Max Power Dissipation=125mW, Min Operating Temperature=-55°C, Package Quantity=1, Resistance=10kR, Resistance Tolerance=1%, Supplier Part Number 1=445-7534-1-ND, Temperature Coefficient=100ppm/°C, Tolerance=10%, Voltage=50V, Case/Package=0805, Category="Ceramic Capacitors", ComponentLink1Description=https://datasheet.ciiva.com/11788/0900766b80c1bb00-11788128.pdf?src-supplier=RSComponents, ComponentLink1URL=https://datasheet.ciiva.com/11788/0900766b80c1bb00-11788128.pdf?src-supplier=RSComponents, ComponentLink2Description=https://datasheet.ciiva.com/6250/tdkmlcccaprange-6250821.pdf?src-supplier=Digi-Key, ComponentLink2URL=https://datasheet.ciiva.com/6250/tdkmlcccaprange-6250821.pdf?src-supplier=Digi-Key, ComponentLink3Description=https://datasheet.ciiva.com/24191/e412-c-24191447.pdf?src-supplier=Future+Electronics, ComponentLink3URL=https://datasheet.ciiva.com/24191/e412-c-24191447.pdf?src-supplier=Future+Electronics, ComponentLink4Description=https://datasheet.ciiva.com/6250/tdkmlcccaprange-6250824.pdf?src-supplier=Digi-Key, ComponentLink4URL=https://datasheet.ciiva.com/6250/tdkmlcccaprange-6250824.pdf?src-supplier=Digi-Key, ComponentLink5Description=https://datasheet.ciiva.com/23803/1796654-23803035.pdf?src-supplier=Newark, ComponentLink5URL=https://datasheet.ciiva.com/23803/1796654-23803035.pdf?src-supplier=Newark, ComponentLink6Description=https://datasheet.ciiva.com/28602/1571323-28602204.pdf?src-supplier=Element14, ComponentLink6URL=https://datasheet.ciiva.com/28602/1571323-28602204.pdf?src-supplier=Element14, Construction=Flat, Depth=1.25mm, Features="Moisture Resistant", Height=0.85mm, Lead Free="Lead Free", Length=2mm, Military Standard=Not, Mount="Surface Mount", Number of Pins=2, Number of Terminations=2, Packaging="Tape and Reel", Power Rating=125mW, Pricing 1="1=0,15000, 10=0,10900, 50=0,06160, 100=0,05100, 500=0,03578, 1000=0,02962 (USD)", Pricing 2="1=0,10000, 10=0,04200, 100=0,01690, 1000=0,00759, 2500=0,00659 (USD)", Radiation Hardening=No, REACH SVHC="No SVHC", Resistor Type=Ceramic, RoHS=Yes, RoHS Compliant=Yes, Series=C, Size Code=0805, Stock 1=54853, Stock 2=3512962, Supplier 1=Digi-Key, Supplier 2=Digi-Key, Supplier Part Number 2=311-10.0KCRCT-ND, Technology="THICK FILM", Termination=SMD/SMT, Thickness=0.037inch, Voltage Rating=50V, Voltage Rating (DC)=50V, Weight=0.000194oz, Width=0.049inch
R11 R12 R13 R14 R16 R17: "CRCW Thick Film Commodity Chip Resistor 0805 Size 33K Ohm 1% 0.125 W 100 ppm/K 2-Pin SMD Paper T/R", Case/Package=0805, Manufacturer="Vishay Dale", Manufacturer Part Number=CRCW080533K0FKEBC, Max Operating Temperature=155°C, Max Power Dissipation=125mW, Min Operating Temperature=-55°C, Resistance=33kR, Resistor Type="Thick Film", Supplier Part Number 1=541-CRCW080533K0FKEBCCT-ND, Temperature Coefficient=100ppm/°C, Tolerance=1%, ComponentLink1Description=http://www.vishay.com/docs/28773/crcwce3.pdf?src-supplier=Digi-Key, ComponentLink1URL=http://www.vishay.com/docs/28773/crcwce3.pdf?src-supplier=Digi-Key, Number of Terminations=2, Packaging="Tape and Reel", Pricing 1="1=0,10000, 10=0,06300, 100=0,02540, 1000=0,01143, 2500=0,00992, 5000=0,00819 (USD)", RoHS=Yes, RoHS Compliant=Yes, Stock 1=39990, Supplier 1=Digi-Key
SW1: "Switch Tactile N.O. SPST Round Button Gull Wing 0.05A 12VDC 100000Cycles 1.27N SMD T/R", Color=Black, Contact Resistance=100mR, Current Rating=50mA, Manufacturer="ITT C&K", Manufacturer Part Number=PTS645SL43SMTR92LFS, Max Operating Temperature=60°C, Max Voltage Rating (DC)=12V, Min Operating Temperature=-20°C, Operating Force=1.27N, Package Quantity=1000, Supplier Part Number 1=CKN10880CT-ND, Actuator Length=0.85mm, Actuator Material=Nylon,Polyamide,PA66, Actuator Type=Standard, Category="Tactile Switches", ComponentLink1Description=https://datasheet.ciiva.com/26927/getdatasheetpartid-774114-26927132.pdf?src-supplier=Verical, ComponentLink1URL=https://datasheet.ciiva.com/26927/getdatasheetpartid-774114-26927132.pdf?src-supplier=Verical, Contact Material=Bronze,Brass,Silver, Contact Plating=Silver, Depth=9mm, Lead Free="Lead Free", Length=6mm, Max Current Rating=50mA, Mechanical Life=100000Cycles, Mount="Surface Mount", Orientation=Straight, Packaging="Tape and Reel", Pricing 1="1=0,15000, 10=0,14900, 25=0,14160, 100=0,12870, 250=0,12104, 500=0,11072 (USD)", RoHS=Yes, RoHS Compliant=Yes, Series=PTS645, Size=6mm, Stock 1=52166, Supplier 1=Digi-Key, Switch Function=Off-Mom, Termination="Gull Wing", Throw Configuration=SPST, Voltage Rating (DC)=12V, Illumination Type=Non-Illuminated
U1: "SIMPLE SWITCHER® 4.5V to 40V, 3A Low Component Count Step-Down Regulator 5-DDPAK/TO-263", Case/Package=TO-263, Manufacturer="TI National Semiconductor", Manufacturer Part Number=LM2596S-5.0/NOPB, Max Operating Temperature=125°C, Max Output Current=3A, Max Input Voltage=40V, Min Operating Temperature=-40°C, Min Input Voltage=4.5V, Nominal Output Voltage=5V, Package Quantity=45, Quiescent Current=5mA, Supplier Part Number 1=LM2596S-5.0/NOPB-ND, Switching Frequency=173kHz, Category="Power Supply Modules", ComponentLink1Description=https://datasheet.ciiva.com/14150/jqlm2596x-xx-e-14150651.pdf?src-supplier=Distrelec, ComponentLink1URL=https://datasheet.ciiva.com/14150/jqlm2596x-xx-e-14150651.pdf?src-supplier=Distrelec, ComponentLink2Description=https://datasheet.ciiva.com/27050/836385-27050287.pdf?src-supplier=Jameco, ComponentLink2URL=https://datasheet.ciiva.com/27050/836385-27050287.pdf?src-supplier=Jameco, ComponentLink3Description=https://datasheet.ciiva.com/15112/getdatasheetpartid-112894-15112928.pdf?src-supplier=Verical, ComponentLink3URL=https://datasheet.ciiva.com/15112/getdatasheetpartid-112894-15112928.pdf?src-supplier=Verical, ComponentLink4Description=https://datasheet.ciiva.com/41457/001013813-da-01-en-ic-reg-buc-lm2596s-5-0-nopb-to-263-5-tid-41457757.pdf?src-supplier=Conrad, ComponentLink4URL=https://datasheet.ciiva.com/41457/001013813-da-01-en-ic-reg-buc-lm2596s-5-0-nopb-to-263-5-tid-41457757.pdf?src-supplier=Conrad, ComponentLink5Description=https://datasheet.ciiva.com/22669/1874590-22669463.pdf?src-supplier=Element14, ComponentLink5URL=https://datasheet.ciiva.com/22669/1874590-22669463.pdf?src-supplier=Element14, ComponentLink6Description=https://datasheet.ciiva.com/6596/lm2596-6596343.pdf?src-supplier=Digi-Key, ComponentLink6URL=https://datasheet.ciiva.com/6596/lm2596-6596343.pdf?src-supplier=Digi-Key, Contact Plating=Tin,Matte, Efficiency=80%, Height=4.57mm, Lead Free="Contains Lead", Length=10.16mm, Mount="Surface Mount", Number of Outputs=1, Number of Pins=5, Operating Supply Voltage=40V, Output Current=3A, Output Type=Fixed, Output Voltage=5V, Packaging=Rail/Tube, Pricing 1="1=7,14000, 10=6,45200, 25=6,15160, 100=5,34150, 250=5,10148, 500=4,95424 (USD)", Radiation Hardening=No, REACH SVHC="No SVHC", RoHS=Yes, RoHS Compliant=Yes, Series=LM2596, Supplier 1=Digi-Key, Weight=0.25lb, Width=8.64mm
U2 U4 U5: "IC DRIVER HIGH/LOW SIDE 8SOIC", Case/Package=SOIC, Manufacturer=Infineon, Manufacturer Part Number=IR2101STRPBF, Max Operating Temperature=150°C, Max Output Current=360mA, Max Supply Voltage=20V, Min Operating Temperature=-40°C, Min Supply Voltage=10V, Package Quantity=1, Supplier Part Number 1=IR2101SPBFCT-ND, Category="Gate Drivers", Channel Type=Independent, Fall Time=90ns, Halogen Free="Halogen Free", Height=0.059inch, Lead Free="Lead Free", Length=0.196inch, Mount="Surface Mount", Number of Channels=2, Number of Drivers=2, Number of Outputs=2, Number of Pins=8, Output Current=360mA, Packaging="Cut Tape", Pricing 1="1=2,51000, 10=2,25500, 25=2,12760, 100=1,81290, 250=1,70224, 500=1,48946, 1000=1,48020 (USD)", Propagation Delay=160ns, REACH SVHC="No SVHC", RoHS=Yes, RoHS Compliant=Yes, Stock 1=11317, Supplier 1=Digi-Key, Width=0.157inch
U3: library part IC_MCU_ATMEGA328P_AU, "IC MCU 8BIT 32KB FLASH 32TQFP", Case/Package=TQFP, Manufacturer=Microchip, Manufacturer Part Number=ATMEGA328P-AU, Supplier Part Number 1=ATMEGA328P-AU-ND, Category=Microcontrollers, ComponentLink1Description=http://www.farnell.com/datasheets/2047852.pdf?src-supplier=Farnell, ComponentLink1URL=http://www.farnell.com/datasheets/2047852.pdf?src-supplier=Farnell, ComponentLink2Description=https://4donline.ihs.com/images/VipMasterIC/IC/ATML/ATML-S-A0002642585/ATML-S-A0002642585-1.pdf?hkey=6D3A4C79FDBF58556ACFDE234799DDF0&src-supplier=Farnell, ComponentLink2URL=https://4donline.ihs.com/images/VipMasterIC/IC/ATML/ATML-S-A0002642585/ATML-S-A0002642585-1.pdf?hkey=6D3A4C79FDBF58556ACFDE234799DDF0&src-supplier=Farnell, ComponentLink3Description=https://4donline.ihs.com/images/VipMasterIC/IC/ATML/ATML-S-A0002642585/ATML-S-A0002642585-1.pdf?src-supplier=Element14, ComponentLink3URL=https://4donline.ihs.com/images/VipMasterIC/IC/ATML/ATML-S-A0002642585/ATML-S-A0002642585-1.pdf?src-supplier=Element14, ComponentLink4Description=http://www.farnell.com/datasheets/798182.pdf?src-supplier=Newark, ComponentLink4URL=http://www.farnell.com/datasheets/798182.pdf?src-supplier=Newark, ComponentLink5Description=http://www.microchip.com/mymicrochip/filehandler.aspx?ddocname=en589968&src-supplier=Digi-Key, ComponentLink5URL=http://www.microchip.com/mymicrochip/filehandler.aspx?ddocname=en589968&src-supplier=Digi-Key, RoHS=Yes, RoHS Compliant=Yes, Supplier 1=Digi-Key
X1: library part CRYSTAL_20.000MHZ_10PF_SMD, "Crystal 20MHz ±20ppm (Tol) ±20ppm (Stability) 10pF FUND 100Ohm 4-Pin Ultra Mini-CSMD T/R", Case/Package=CSMD, ESR (Equivalent Series Resistance)=100R, Frequency Stability=20ppm, Load Capacitance=10pF, Manufacturer=Abracon, Manufacturer Part Number=ABM10-20.000MHZ-E20-T, Max Operating Temperature=70°C, Min Operating Temperature=-20°C, Operating Frequency="20 MHz", Package Quantity=1000, Supplier Part Number 1=535-9091-1-ND, Category=Crystals, ComponentLink1Description=https://datasheet.ciiva.com/15116/getdatasheetpartid-719767-15116692.pdf?src-supplier=Verical, ComponentLink1URL=https://datasheet.ciiva.com/15116/getdatasheetpartid-719767-15116692.pdf?src-supplier=Verical, ComponentLink2Description=https://datasheet.ciiva.com/856/abm10-856517.pdf?src-supplier=Digi-Key, ComponentLink2URL=https://datasheet.ciiva.com/856/abm10-856517.pdf?src-supplier=Digi-Key, ComponentLink3Description=https://datasheet.ciiva.com/3175/abm10-3175612.pdf?src-supplier=Avnet, ComponentLink3URL=https://datasheet.ciiva.com/3175/abm10-3175612.pdf?src-supplier=Avnet, ComponentLink4Description=https://datasheet.ciiva.com/856/abm10-856518.pdf?src-supplier=Digi-Key, ComponentLink4URL=https://datasheet.ciiva.com/856/abm10-856518.pdf?src-supplier=Digi-Key, ComponentLink5Description=https://datasheet.ciiva.com/856/abm10-856519.pdf?src-supplier=Digi-Key, ComponentLink5URL=https://datasheet.ciiva.com/856/abm10-856519.pdf?src-supplier=Digi-Key, ComponentLink6Description=https://datasheet.ciiva.com/16410/abm10-16410922.pdf?src-supplier=Future+Electronics, ComponentLink6URL=https://datasheet.ciiva.com/16410/abm10-16410922.pdf?src-supplier=Future+Electronics, Depth=2mm, Frequency=20MHz, Frequency Tolerance=20ppm, Height=0.02inch, Lead Free="Lead Free", Length=2.5mm, Mount="Surface Mount", Number of Pins=4, Packaging="Tape and Reel", Pricing 1="1=1,40000, 10=1,34200, 50=1,31040, 100=1,12320, 500=1,09200 (USD)", REACH SVHC="No SVHC", RoHS=Yes, RoHS Compliant=Yes, Series=ABM10, Series Resistance=100R, Stock 1=927, Supplier 1=Digi-Key, Termination=SMD/SMT, Tolerance=20ppm, Width=2mm

## Via types
v1: diameter 1, hole 0.75, Top Layer to Bottom Layer, 45 vias
v2: diameter 0.8, hole 0.5, Top Layer to Bottom Layer, 3 vias

## Nets (pads, with @x,y where several pads share a name; then routed paths per layer and width w, separated by ;. In a path a pad name is that pad's centre, name@x,y a point inside that pad or via, vN(x,y) a via of type N, cw(c..) or ccw(c..) an arc to the next point about the centre after c; other vN are vias at no path point)
5V: C5.1 C7.1 C8.1 C9.2 C10.2 C11.2 C12.2 C17.1 C19.1 D2.2 D5.2 D6.2 J2.4 J3.4 J4.1 L1.2 R1.2 R7.2 U1.4 U2.1 U3.4 U3.6 U3.18 U3.20 U4.1 U5.1 | length 50.3
  Top Layer w0.254: C8.1 72.022,61.129 72.39,61.497 C11.2 72.39,63.131 73.895,64.636 U3.4 ; C12.2 74.422,77.47 74.695,77.197 U3.20 ; U3.6 75.495,64.236 76.2,63.531 C10.2 ; C9.2 76.032,77.384 76.295,77.121 U3.18
  Bottom Layer w1: U1.4 81.71,75.868 83.312,77.47 83.312,79.756 84.328,80.772 93.726,80.772 95.25,79.248 95.25,72.39 96.52,71.12
DRV1_HIN: U2.2 U3.13 | length 30.3
  Top Layer w0.254: U3.13 85.25,70.452 87.884,67.818 87.884,52.578 89.587,50.875 U2.2
DRV1_HO: R2.1 U2.7
DRV1_LIN: U2.3 U3.12 | length 30.6
  Top Layer w0.254: U3.12 84.78,69.652 86.868,67.564 86.868,52.07 89.333,49.605 U2.3
DRV1_LO: R3.1 U2.5
DRV1_VB: C6.1 D2.1 U2.8
DRV1_VS: C6.2 U2.6
DRV2_HIN: R4.1 U3.15 U4.2 | length 22.8
  Top Layer w0.254: U3.15@78.502,72.059 86.183,72.059 ; R4.1 87.121,72.997 86.183,72.059 ; U4.2 90.498,66.115 89.916,66.697 89.916,68.326 86.183,72.059
DRV2_HO: R9.1 U4.7
DRV2_LIN: U3.14 U4.3 | length 17
  Top Layer w0.254: U3.14 85.72,71.252 88.9,68.072 88.9,66.294 90.349,64.845 U4.3
DRV2_LO: R10.1 U4.5
DRV2_VB: C16.1 D5.1 U4.8
DRV2_VS: C16.2 U4.6
DRV3_HIN: R6.1 U3.17 U5.2 | length 22.9
  Top Layer w0.254: U3.17 77.112,74.269 77.112,75.334 77.978,76.2 81.534,76.2 ; R6.1 81.534,76.2 ; U5.2 89.357,81.101 87.635,82.823 86.633,82.823 84.328,80.518 84.328,77.47 83.058,76.2 81.534,76.2
DRV3_HO: R15.1 U5.7
DRV3_LIN: R5.1 U3.16 U5.3 | length 19.3
  Top Layer w0.254: U3.16 84.79,72.852 85.303,73.365 R5.1 88.138,78.74 89.229,79.831 U5.3
DRV3_LO: R18.1 U5.5
DRV3_VB: C18.1 D6.1 U5.8
DRV3_VS: C18.2 U5.6
GND: BUZZ1.2 C2.2 C3.2 C4.2 C5.2 C7.2 C8.2 C9.1 C10.1 C11.1 C12.1 C14.1 C15.1 C17.2 C19.2 D3.2 D4.1 D7.1 D8.1 J2.6 J3.6 J4.3 P2.1 Q2.3 Q4.3 Q6.3 R20.1 R21.1 R22.1 SW1.1 U1.3 U1.6 U2.4 U3.3 U3.5 U3.21 U4.4 U5.4 X1.2 X1.4 | length 17.3
  Top Layer w0.254: C11.1 70.19,62.097 70.513,62.42 70.744,62.42 73.095,64.771 U3.3 ; C12.1 72.222,78.261 73.895,76.588 U3.21 ; C8.2 74.622,60.875 74,61.497 C10.1 74,63.536 74.695,64.231 U3.5
  other v1: 38.14,86.4 40.64,86.4 43.14,86.4 38.14,88.9 40.64,88.9 43.14,88.9 38.14,91.4 40.64,91.4 43.14,91.4
HO_GATE_1: Q1.1 R2.2
HO_GATE_2: Q3.1 R9.2
HO_GATE_3: Q5.1 R15.2
LO_GATE_1: Q2.1 R3.2
LO_GATE_2: Q4.1 R10.2
LO_GATE_3: Q6.1 R18.2
MCU_A0: R11.2 R12.1 R20.2 U3.23
MCU_A1: R13.2 R14.1 R21.2 U3.24
MCU_A2: R16.2 R17.1 R22.2 U3.25
MCU_BUZZ1: BUZZ1.1 U3.9 | length 22.2